# Altium PCB 324 Electrode Wafer PCB.PcbDoc (part 2 of 2)
Units mm, origin at the board's own origin, x right, y up, seen from the top; angles counter-clockwise.
Board outline 565 x 565 mm, 2 copper layers (Top Layer, Bottom Layer); 5 components, 324 nets, 648 pads, 0 vias.
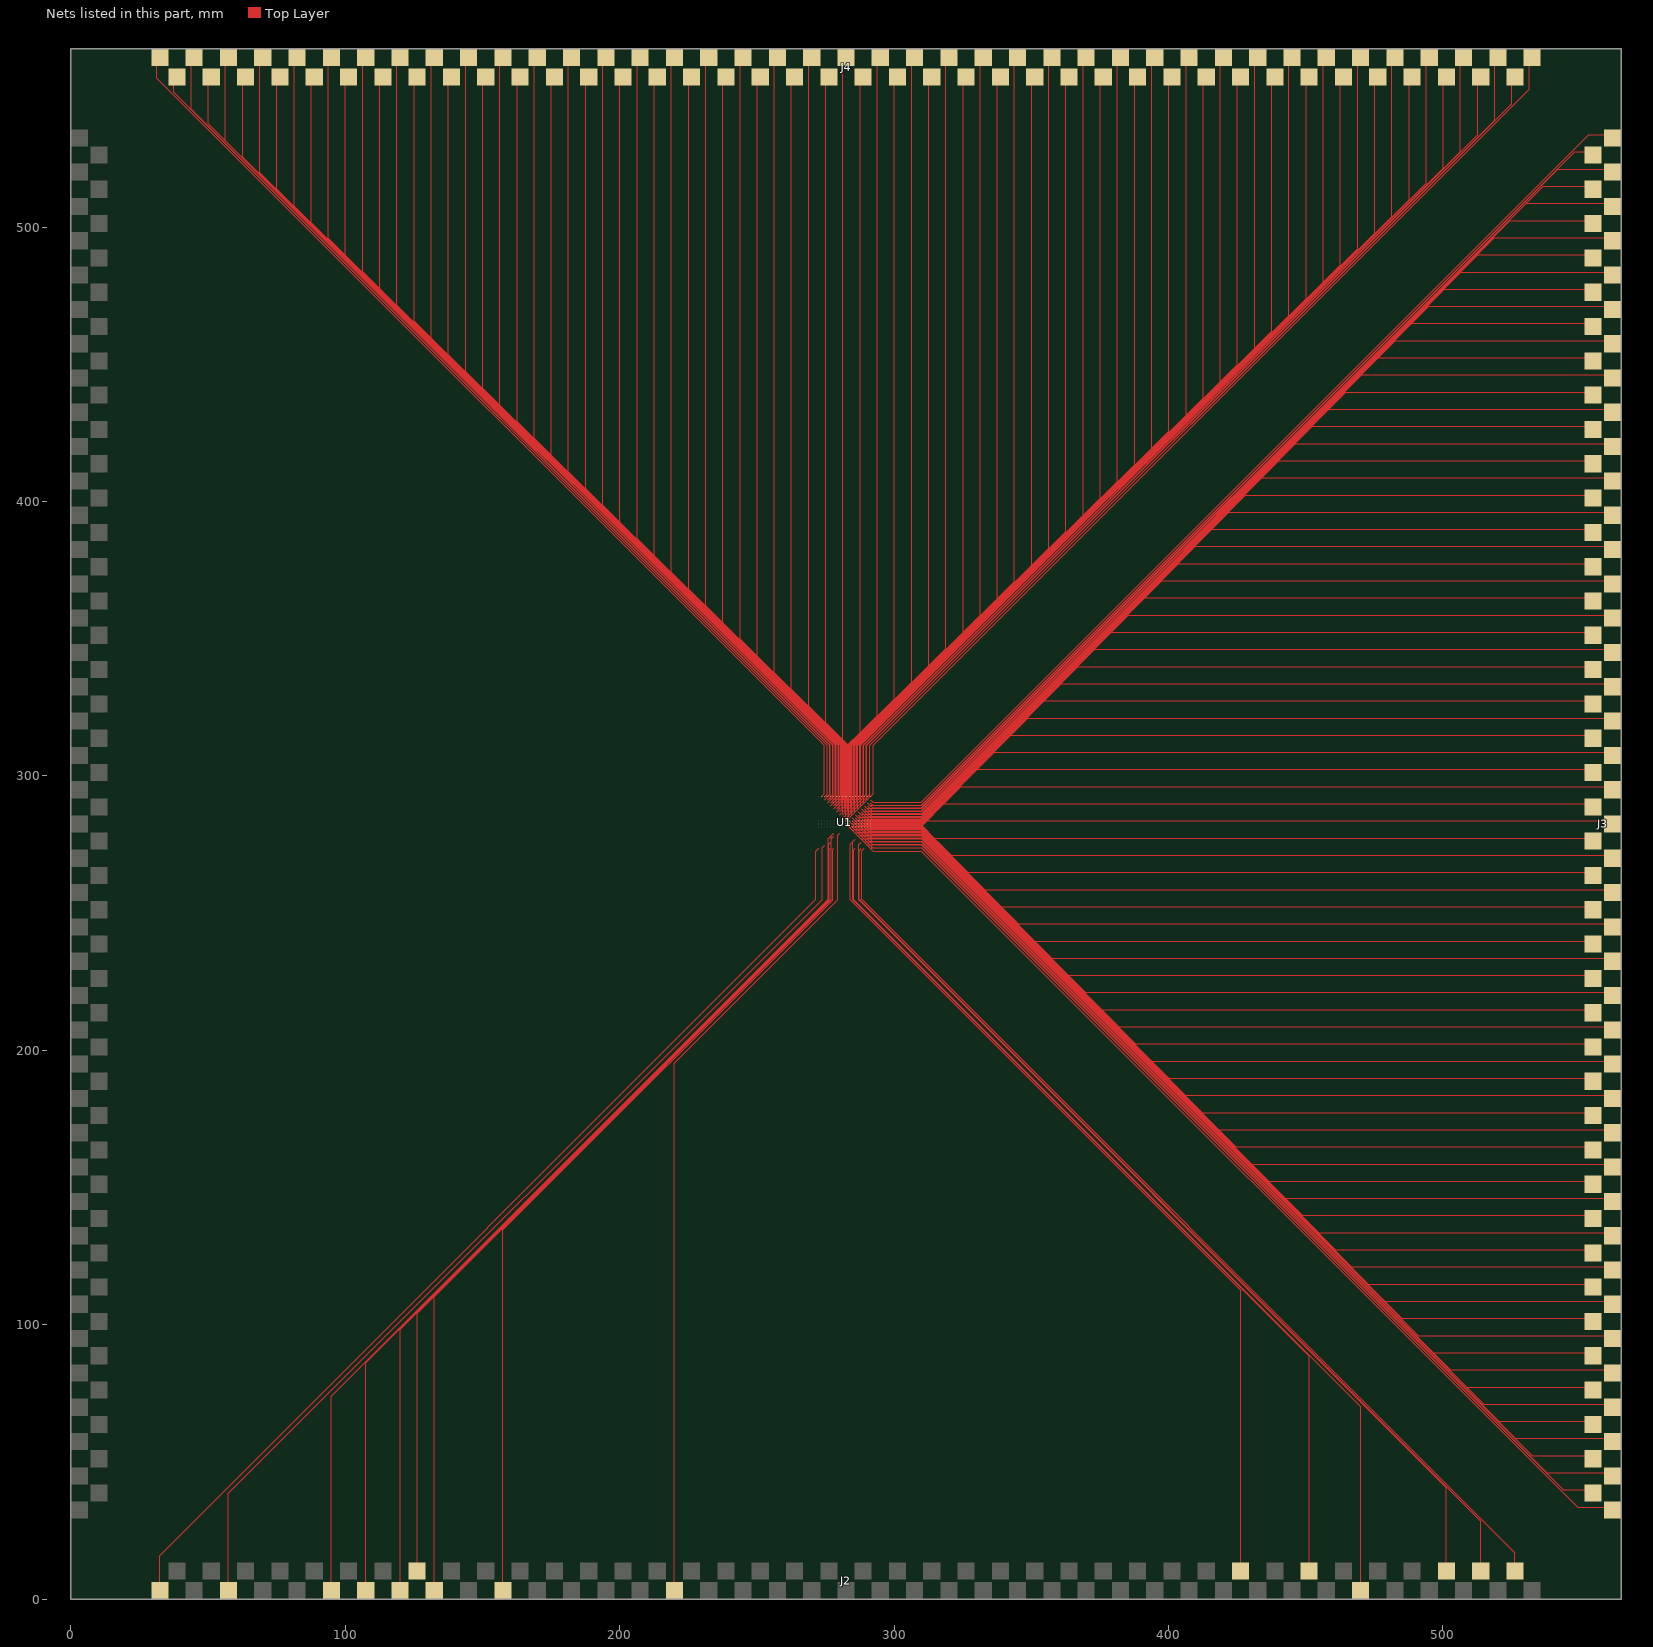
[diagram p2: the nets of this part, all layers, seen from the top]

## Nets (pads, with @x,y where several pads share a name; then routed paths per layer and width w, separated by ;. In a path a pad name is that pad's centre, name@x,y a point inside that pad or via, vN(x,y) a via of type N, cw(c..) or ccw(c..) an arc to the next point about the centre after c; other vN are vias at no path point) (continued)
NetJ2_67: J2.71 U1.239 | length 350.3
  Top Layer w0.05: J2.71@95,3.125 95,7.85 95,74 276,255 276,277.111 U1.239@276.944,278.056
NetJ2_68: J2.67 U1.311 | length 335.5
  Top Layer w0.05: J2.67@120,3.125 120,7.05 120,98.4 276.4,254.8 276.4,273.067 U1.311@276.944,273.611
NetJ2_69: J2.69 U1.275 | length 342.9
  Top Layer w0.05: J2.69@107.5,3.125 107.5,7.8 107.5,86.2 276.2,254.9 276.2,275.089 U1.275@276.944,275.833
NetJ2_70: J2.65 U1.240 | length 335.2
  Top Layer w0.05: J2.65@132.5,3.125 132.5,7.5 132.5,110.25 277.2,254.95 277.2,277.2 U1.240@278.056,278.056
NetJ2_71: J2.51 U1.224 | length 301
  Top Layer w0.05: J2.51@220,3.125 220,195.4 279.5,254.9 279.5,278.389 U1.224@280.278,279.167
NetJ2_72: J2.61 U1.312 | length 320.4
  Top Layer w0.05: J2.61@157.5,3.125 157.5,6.7 157.5,134.65 277.6,254.75 277.6,273.156 U1.312@278.056,273.611
NetJ2_73: J2.66 U1.222 | length 331.7
  Top Layer w0.05: J2.66@126.25,10.375 126.25,14.95 126.25,104.15 277.1,255 277.1,278.211 U1.222@278.056,279.167
NetJ2_74: J2.77 U1.291 | length 361.6
  Top Layer w0.05: J2.77@57.5,3.125 57.5,7.1 57.5,38.6 273.85,254.95 273.85,273.85 U1.291@274.722,274.722
NetJ2_75: J2.11 U1.319 | length 347.2
  Top Layer w0.05: U1.319@285.833,273.611 285.289,273.067 285.289,254.961 470,70.25 470,8.7 J2.11@470,3.125
NetJ2_76: J2.18 U1.282 | length 324.6
  Top Layer w0.05: U1.282@284.722,275.833 284.067,275.178 284.067,254.883 426.25,112.7 426.25,15.2 ; J2.18@426.25,10.375 426.25,15.2
NetJ2_77: J2.14 U1.265 | length 335.8
  Top Layer w0.05: U1.265@285.833,276.944 284.989,276.1 284.989,254.811 451.25,88.55 451.25,15.95 J2.14@451.25,10.375
NetJ2_78: J2.6 U1.285 | length 354.6
  Top Layer w0.05: U1.285@288.056,275.833 287.083,274.861 287.083,254.867 501.25,40.7 501.25,16 J2.6@501.25,10.375
NetJ2_79: J2.4 U1.321 | length 357.4
  Top Layer w0.05: U1.321@288.056,273.611 287.283,272.839 287.283,255 513.75,28.533 513.75,16.45 J2.4@513.75,10.375
NetJ2_80: J2.81 U1.307 | length 369.9
  Top Layer w0.05: J2.81@32.5,3.125 32.5,15.95 271.55,255 271.55,272.65 272.5,273.6 U1.307@272.5,273.611
NetJ2_81: J2.2 U1.322 | length 362.2
  Top Layer w0.05: U1.322@289.167,273.611 288.306,272.75 288.306,254.994 526.25,17.05 526.25,15.25 J2.2@526.25,10.375
NetJ3_1: J3.52 U1.192 | length 297.9
  Top Layer w0.05: U1.192@284.722,281.389 285.6,280.511 310.05,280.511 375.7,214.861 553.514,214.861 J3.52@554.625,213.75
NetJ3_2: J3.55 U1.215 | length 306.9
  Top Layer w0.05: U1.215@290.278,280.278 290.744,279.811 310.25,279.811 393.95,196.111 560.764,196.111 J3.55@561.875,195
NetJ3_3: J3.59 U1.211 | length 321.7
  Top Layer w0.05: U1.211@285.833,280.278 286.7,279.411 310.05,279.411 418.35,171.111 560.764,171.111 J3.59@561.875,170
NetJ3_4: J3.64 U1.231 | length 324.7
  Top Layer w0.05: U1.231@288.056,279.167 288.811,278.411 310.1,278.411 448.65,139.861 553.514,139.861 J3.64@554.625,138.75
NetJ3_5: J3.67 U1.252 | length 336
  Top Layer w0.05: U1.252@291.389,278.056 291.933,277.511 310.2,277.511 466.6,121.111 560.764,121.111 J3.67@561.875,120
NetJ3_6: J3.71 U1.248 | length 350.8
  Top Layer w0.05: U1.248@286.944,278.056 287.889,277.111 310,277.111 491,96.111 560.764,96.111 J3.71@561.875,95
NetJ3_7: J3.74 U1.268 | length 348.6
  Top Layer w0.05: U1.268@289.167,276.944 290.05,276.061 310.05,276.061 508.75,77.361 553.514,77.361 J3.74@554.625,76.25
NetJ3_8: J3.75 U1.267 | length 359.5
  Top Layer w0.05: U1.267@288.056,276.944 289.039,275.961 310,275.961 514.85,71.111 560.764,71.111 J3.75@561.875,70
NetJ3_9: J3.79 U1.306 | length 365.6
  Top Layer w0.05: U1.306@291.389,274.722 292.25,273.861 310.05,273.861 537.8,46.111 560.764,46.111 J3.79@561.875,45
NetJ3_10: J3.16 U1.126 | length 327.9
  Top Layer w0.05: U1.126@291.389,285.833 291.844,285.378 310.017,285.378 464.5,439.861 553.514,439.861 J3.16@554.625,438.75
NetJ3_11: J3.17 U1.125 | length 333.7
  Top Layer w0.05: U1.125@290.278,285.833 290.833,285.278 310.067,285.278 458.4,433.611 560.764,433.611 J3.17@561.875,432.5
NetJ3_12: J3.65 U1.230 | length 335.7
  Top Layer w0.05: U1.230@286.944,279.167 287.8,278.311 310.05,278.311 454.75,133.611 560.764,133.611 J3.65@561.875,132.5
NetJ3_13: J3.43 U1.174 | length 282.3
  Top Layer w0.05: U1.174@284.722,282.5 285.461,281.761 310.15,281.761 320.8,271.111 560.764,271.111 J3.43@561.875,270
NetJ3_14: J3.45 U1.172 | length 289.7
  Top Layer w0.05: U1.172@282.5,282.5 283.439,281.561 310.05,281.561 333,258.611 560.764,258.611 J3.45@561.875,257.5
NetJ3_15: J3.42 U1.175 | length 271.4
  Top Layer w0.05: U1.175@285.833,282.5 286.472,281.861 310.2,281.861 314.7,277.361 553.514,277.361 J3.42@554.625,276.25
NetJ3_16: J3.47 U1.197 | length 286.7
  Top Layer w0.05: U1.197@290.278,281.389 290.656,281.011 310.3,281.011 345.2,246.111 560.764,246.111 J3.47@561.875,245
NetJ3_17: J3.48 U1.196 | length 283.1
  Top Layer w0.05: U1.196@289.167,281.389 289.644,280.911 310.25,280.911 351.3,239.861 553.514,239.861 J3.48@554.625,238.75
NetJ3_18: J3.46 U1.198 | length 275.7
  Top Layer w0.05: U1.198@291.389,281.389 291.667,281.111 310.35,281.111 339.1,252.361 553.514,252.361 J3.46@554.625,251.25
NetJ3_19: J3.51 U1.193 | length 301.5
  Top Layer w0.05: U1.193@285.833,281.389 286.611,280.611 310.1,280.611 369.6,221.111 560.764,221.111 J3.51@561.875,220
NetJ3_20: J3.58 U1.212 | length 310.8
  Top Layer w0.05: U1.212@286.944,280.278 287.711,279.511 310.1,279.511 412.25,177.361 553.514,177.361 J3.58@554.625,176.25
NetJ3_21: J3.62 U1.233 | length 317.3
  Top Layer w0.05: U1.233@290.278,279.167 290.833,278.611 310.2,278.611 436.45,152.361 553.514,152.361 J3.62@554.625,151.25
NetJ3_22: J3.63 U1.232 | length 328.3
  Top Layer w0.05: U1.232@289.167,279.167 289.822,278.511 310.15,278.511 442.55,146.111 560.764,146.111 J3.63@561.875,145
NetJ3_23: J3.68 U1.251 | length 332.4
  Top Layer w0.05: U1.251@290.278,278.056 290.922,277.411 310.15,277.411 472.7,114.861 553.514,114.861 J3.68@554.625,113.75
NetJ3_24: J3.73 U1.269 | length 352.1
  Top Layer w0.05: U1.269@290.278,276.944 291.061,276.161 310.1,276.161 502.65,83.611 560.764,83.611 J3.73@561.875,82.5
NetJ3_25: J3.77 U1.287 | length 362
  Top Layer w0.05: U1.287@290.278,275.833 291.15,274.961 310.05,274.961 526.4,58.611 560.764,58.611 J3.77@561.875,57.5
NetJ3_26: J3.76 U1.288 | length 351.1
  Top Layer w0.05: U1.288@291.389,275.833 292.161,275.061 310.1,275.061 520.3,64.861 553.514,64.861 J3.76@554.625,63.75
NetJ3_27: J3.80 U1.305 | length 362.1
  Top Layer w0.05: U1.305@290.278,274.722 291.239,273.761 310,273.761 543.9,39.861 553.514,39.861 J3.80@554.625,38.75
NetJ3_28: J3.25 U1.141 | length 315.8
  Top Layer w0.05: U1.141@288.056,284.722 288.722,284.056 310.144,284.056 409.7,383.611 560.764,383.611 J3.25@561.875,382.5
NetJ3_29: J3.22 U1.144 | length 312.7
  Top Layer w0.05: U1.144@291.389,284.722 291.756,284.356 310,284.356 428.006,402.361 553.514,402.361 J3.22@554.625,401.25
NetJ3_30: J3.23 U1.143 | length 318.6
  Top Layer w0.05: U1.143@290.278,284.722 290.744,284.256 310.044,284.256 421.9,396.111 560.764,396.111 J3.23@561.875,395
NetJ3_31: J3.20 U1.122 | length 322.3
  Top Layer w0.05: U1.122@286.944,285.833 287.8,284.978 310.217,284.978 440.1,414.861 553.514,414.861 J3.20@554.625,413.75
NetJ3_32: J3.21 U1.121 | length 328.1
  Top Layer w0.05: U1.121@285.833,285.833 286.789,284.878 310.267,284.878 434,408.611 560.764,408.611 J3.21@561.875,407.5
NetJ3_33: J3.18 U1.124 | length 325.1
  Top Layer w0.05: U1.124@289.167,285.833 289.822,285.178 310.117,285.178 452.3,427.361 553.514,427.361 J3.18@554.625,426.25
NetJ3_34: J3.19 U1.123 | length 330.9
  Top Layer w0.05: U1.123@288.056,285.833 288.811,285.078 310.167,285.078 446.2,421.111 560.764,421.111 J3.19@561.875,420
NetJ3_35: J3.44 U1.173 | length 278.8
  Top Layer w0.05: U1.173@283.611,282.5 284.45,281.661 310.1,281.661 326.9,264.861 553.514,264.861 J3.44@554.625,263.75
NetJ3_36: J3.50 U1.194 | length 290.5
  Top Layer w0.05: U1.194@286.944,281.389 287.622,280.711 310.15,280.711 363.5,227.361 553.514,227.361 J3.50@554.625,226.25
NetJ3_37: J3.54 U1.216 | length 296
  Top Layer w0.05: U1.216@291.389,280.278 291.756,279.911 310.3,279.911 387.85,202.361 553.514,202.361 J3.54@554.625,201.25
NetJ3_38: J3.57 U1.213 | length 314.3
  Top Layer w0.05: U1.213@288.056,280.278 288.722,279.611 310.15,279.611 406.15,183.611 560.764,183.611 J3.57@561.875,182.5
NetJ3_39: J3.61 U1.234 | length 320.9
  Top Layer w0.05: U1.234@291.389,279.167 291.844,278.711 310.25,278.711 430.35,158.611 560.764,158.611 J3.61@561.875,157.5
NetJ3_40: J3.69 U1.250 | length 343.4
  Top Layer w0.05: U1.250@289.167,278.056 289.911,277.311 310.1,277.311 478.8,108.611 560.764,108.611 J3.69@561.875,107.5
NetJ3_41: J3.72 U1.270 | length 341.2
  Top Layer w0.05: U1.270@291.389,276.944 292.072,276.261 310.15,276.261 496.55,89.861 553.514,89.861 J3.72@554.625,88.75
NetJ3_42: J3.78 U1.286 | length 358.5
  Top Layer w0.05: U1.286@289.167,275.833 290.139,274.861 310,274.861 532.5,52.361 553.514,52.361 J3.78@554.625,51.25
NetJ3_43: J3.81 U1.324 | length 370.3
  Top Layer w0.05: U1.324@291.4,273.611 292.35,272.661 310,272.661 549.05,33.611 560.764,33.611 J3.81@561.875,32.5
NetJ3_44: J3.3 U1.53 | length 368.5
  Top Layer w0.05: U1.53@290.278,290.278 291.239,289.317 310.056,289.317 541.85,521.111 560.764,521.111 J3.3@561.875,520
NetJ3_45: J3.1 U1.36 | length 372.1
  Top Layer w0.05: U1.36@291.4,291.389 292.35,290.439 310,290.439 553.172,533.611 560.764,533.611 J3.1@561.875,532.5
NetJ3_46: J3.33 U1.158 | length 296.7
  Top Layer w0.05: U1.158@286.944,283.611 287.622,282.933 310.222,282.933 360.9,333.611 560.764,333.611 J3.33@561.875,332.5
NetJ3_47: J3.30 U1.161 | length 293.6
  Top Layer w0.05: U1.161@290.278,283.611 290.656,283.233 310.072,283.233 379.2,352.361 553.514,352.361 J3.30@554.625,351.25
NetJ3_48: J3.31 U1.160 | length 299.5
  Top Layer w0.05: U1.160@289.167,283.611 289.644,283.133 310.122,283.133 373.1,346.111 560.764,346.111 J3.31@561.875,345
NetJ3_49: J3.28 U1.138 | length 304.4
  Top Layer w0.05: U1.138@284.722,284.722 285.689,283.756 310.294,283.756 391.4,364.861 553.514,364.861 J3.28@554.625,363.75
NetJ3_50: J3.29 U1.162 | length 302.2
  Top Layer w0.05: U1.162@291.389,283.611 291.667,283.333 310.022,283.333 385.3,358.611 560.764,358.611 J3.29@561.875,357.5
NetJ3_51: J3.26 U1.140 | length 307.1
  Top Layer w0.05: U1.140@286.944,284.722 287.711,283.956 310.194,283.956 403.6,377.361 553.514,377.361 J3.26@554.625,376.25
NetJ3_52: J3.27 U1.139 | length 313
  Top Layer w0.05: U1.139@285.833,284.722 286.7,283.856 310.244,283.856 397.5,371.111 560.764,371.111 J3.27@561.875,370
NetJ3_53: J3.24 U1.142 | length 309.9
  Top Layer w0.05: U1.142@289.167,284.722 289.733,284.156 310.094,284.156 415.8,389.861 553.514,389.861 J3.24@554.625,388.75
NetJ3_54: J3.49 U1.195 | length 294.1
  Top Layer w0.05: U1.195@288.056,281.389 288.633,280.811 310.2,280.811 357.4,233.611 560.764,233.611 J3.49@561.875,232.5
NetJ3_55: J3.53 U1.191 | length 308.9
  Top Layer w0.05: U1.191@283.611,281.389 284.589,280.411 310,280.411 381.8,208.611 560.764,208.611 J3.53@561.875,207.5
NetJ3_56: J3.60 U1.210 | length 318.2
  Top Layer w0.05: U1.210@284.722,280.278 285.689,279.311 310,279.311 424.45,164.861 553.514,164.861 J3.60@554.625,163.75
NetJ3_57: J3.66 U1.229 | length 332.1
  Top Layer w0.05: U1.229@285.833,279.167 286.789,278.211 310,278.211 460.85,127.361 553.514,127.361 J3.66@554.625,126.25
NetJ3_58: J3.13 U1.106 | length 344.9
  Top Layer w0.05: U1.106@289.167,286.944 289.911,286.2 310.139,286.2 482.55,458.611 560.764,458.611 J3.13@561.875,457.5
NetJ3_59: J3.11 U1.108 | length 347.7
  Top Layer w0.05: U1.108@291.389,286.944 291.933,286.4 310.039,286.4 494.75,471.111 560.764,471.111 J3.11@561.875,470
NetJ3_60: J3.9 U1.88 | length 354.9
  Top Layer w0.05: U1.88@289.167,288.056 290.05,287.172 310.111,287.172 506.55,483.611 560.764,483.611 J3.9@561.875,482.5
NetJ3_61: J3.8 U1.89 | length 349
  Top Layer w0.05: U1.89@290.278,288.056 291.061,287.272 310.061,287.272 512.65,489.861 553.514,489.861 J3.8@554.625,488.75
NetJ3_62: J3.6 U1.70 | length 355
  Top Layer w0.05: U1.70@289.167,289.167 290.139,288.194 310.133,288.194 524.3,502.361 553.514,502.361 J3.6@554.625,501.25
NetJ3_63: J3.2 U1.54 | length 362.6
  Top Layer w0.05: U1.54@291.389,290.278 292.25,289.417 310.006,289.417 547.95,527.361 553.514,527.361 J3.2@554.625,526.25
NetJ3_64: J3.40 U1.177 | length 270.4
  Top Layer w0.05: U1.177@288.056,282.5 288.494,282.061 310.4,282.061 318.2,289.861 553.514,289.861 J3.40@554.625,288.75
NetJ3_65: J3.41 U1.176 | length 276.3
  Top Layer w0.05: U1.176@286.944,282.5 287.483,281.961 310.45,281.961 312.1,283.611 560.764,283.611 J3.41@561.875,282.5
NetJ3_66: J3.38 U1.179 | length 273.2
  Top Layer w0.05: U1.179@290.278,282.5 290.517,282.261 310.3,282.261 330.4,302.361 553.514,302.361 J3.38@554.625,301.25
NetJ3_67: J3.39 U1.178 | length 279.1
  Top Layer w0.05: U1.178@289.167,282.5 289.506,282.161 310.35,282.161 324.3,296.111 560.764,296.111 J3.39@561.875,295
NetJ3_68: J3.36 U1.155 | length 285.2
  Top Layer w0.05: U1.155@283.611,283.611 284.589,282.633 310.372,282.633 342.6,314.861 553.514,314.861 J3.36@554.625,313.75
NetJ3_69: J3.37 U1.180 | length 281.9
  Top Layer w0.05: U1.180@291.389,282.5 291.528,282.361 310.25,282.361 336.5,308.611 560.764,308.611 J3.37@561.875,307.5
NetJ3_70: J3.34 U1.157 | length 288
  Top Layer w0.05: U1.157@285.833,283.611 286.611,282.833 310.272,282.833 354.8,327.361 553.514,327.361 J3.34@554.625,326.25
NetJ3_71: J3.35 U1.156 | length 293.9
  Top Layer w0.05: U1.156@284.722,283.611 285.6,282.733 310.322,282.733 348.7,321.111 560.764,321.111 J3.35@561.875,320
NetJ3_72: J3.32 U1.159 | length 290.8
  Top Layer w0.05: U1.159@288.056,283.611 288.633,283.033 310.172,283.033 367,339.861 553.514,339.861 J3.32@554.625,338.75
NetJ3_73: J3.56 U1.214 | length 303.4
  Top Layer w0.05: U1.214@289.167,280.278 289.733,279.711 310.2,279.711 400.05,189.861 553.514,189.861 J3.56@554.625,188.75
NetJ3_74: J3.70 U1.249 | length 339.8
  Top Layer w0.05: U1.249@288.056,278.056 288.9,277.211 310.05,277.211 484.9,102.361 553.514,102.361 J3.70@554.625,101.25
NetJ3_75: J3.14 U1.105 | length 336.2
  Top Layer w0.05: U1.105@288.056,286.944 288.9,286.1 310.189,286.1 476.45,452.361 553.514,452.361 J3.14@554.625,451.25
NetJ3_76: J3.15 U1.104 | length 342.1
  Top Layer w0.05: U1.104@286.944,286.944 287.889,286 310.239,286 470.35,446.111 560.764,446.111 J3.15@561.875,445
NetJ3_77: J3.12 U1.107 | length 339
  Top Layer w0.05: U1.107@290.278,286.944 290.922,286.3 310.089,286.3 488.65,464.861 553.514,464.861 J3.12@554.625,463.75
NetJ3_78: J3.10 U1.87 | length 346.3
  Top Layer w0.05: U1.87@288.056,288.056 289.039,287.072 310.161,287.072 500.45,477.361 553.514,477.361 J3.10@554.625,476.25
NetJ3_79: J3.4 U1.72 | length 357.8
  Top Layer w0.05: U1.72@291.389,289.167 292.161,288.394 310,288.394 536.467,514.861 553.514,514.861 J3.4@554.625,513.75
NetJ3_80: J3.7 U1.90 | length 357.7
  Top Layer w0.05: U1.90@291.389,288.056 292.072,287.372 310,287.372 518.739,496.111 560.764,496.111 J3.7@561.875,495
NetJ3_81: J3.5 U1.71 | length 363.7
  Top Layer w0.05: U1.71@290.278,289.167 291.15,288.294 310.083,288.294 530.4,508.611 560.764,508.611 J3.5@561.875,507.5
NetJ4_1: J4.54 U1.12 | length 294.9
  Top Layer w0.05: U1.12@284.722,292.5 285.089,292.867 285.089,311.411 362.639,388.961 362.639,553.514 J4.54@363.75,554.625
NetJ4_2: J4.63 U1.49 | length 327.2
  Top Layer w0.05: U1.49@285.833,290.278 286.489,290.933 286.489,311.261 418.889,443.661 418.889,560.764 J4.63@420,561.875
NetJ4_3: J4.65 U1.85 | length 334.6
  Top Layer w0.05: U1.85@285.833,288.056 286.689,288.911 286.689,311.161 431.389,455.861 431.389,560.764 J4.65@432.5,561.875
NetJ4_4: J4.49 U1.65 | length 293
  Top Layer w0.05: U1.65@283.611,289.167 284.189,289.744 284.189,311.311 331.389,358.511 331.389,560.764 J4.49@332.5,561.875
NetJ4_5: J4.74 U1.51 | length 347.5
  Top Layer w0.05: U1.51@288.056,290.278 288.939,291.161 288.939,311.161 487.639,509.861 487.639,553.514 J4.74@488.75,554.625
NetJ4_6: J4.77 U1.34 | length 360.9
  Top Layer w0.05: U1.34@289.167,291.389 290.039,292.261 290.039,311.161 506.389,527.511 506.389,560.764 J4.77@507.5,561.875
NetJ4_7: J4.80 U1.35 | length 361
  Top Layer w0.05: U1.35@290.278,291.389 291.239,292.35 291.239,311.111 525.139,545.011 525.139,553.514 J4.80@526.25,554.625
NetJ4_8: J4.81 U1.18 | length 369.2
  Top Layer w0.05: U1.18@291.389,292.511 292.339,293.461 292.339,311.111 531.389,550.161 531.389,560.764 J4.81@532.5,561.875
NetJ4_9: J4.1 U1.2 | length 370.9
  Top Layer w0.05: J4.1@32.5,561.875 31.389,560.764 31.389,554.283 274.561,311.111 274.561,293.461 U1.2@273.611,292.511
NetJ4_10: J4.2 U1.3 | length 361.5
  Top Layer w0.05: J4.2@38.75,554.625 37.639,553.514 37.639,549.061 275.583,311.117 275.583,293.361 U1.3@274.722,292.5
NetJ4_11: J4.7 U1.5 | length 356.6
  Top Layer w0.05: J4.7@70,561.875 68.889,560.764 68.889,519.85 277.628,311.111 277.628,293.183 U1.5@276.944,292.5
NetJ4_12: J4.8 U1.23 | length 347.9
  Top Layer w0.05: J4.8@76.25,554.625 75.139,553.514 75.139,513.761 277.728,311.172 277.728,292.172 U1.23@276.944,291.389
NetJ4_13: J4.10 U1.59 | length 345.1
  Top Layer w0.05: J4.10@88.75,554.625 87.639,553.514 87.639,501.561 277.928,311.272 277.928,290.15 U1.59@276.944,289.167
NetJ4_14: J4.17 U1.25 | length 332.6
  Top Layer w0.05: J4.17@132.5,561.875 131.389,560.764 131.389,459.511 279.722,311.178 279.722,291.944 U1.25@279.167,291.389
NetJ4_15: J4.18 U1.43 | length 324
  Top Layer w0.05: J4.18@138.75,554.625 137.639,553.514 137.639,453.411 279.822,311.228 279.822,290.933 U1.43@279.167,290.278
NetJ4_16: J4.22 U1.8 | length 311.6
  Top Layer w0.05: J4.22@163.75,554.625 162.639,553.514 162.639,429.117 280.644,311.111 280.644,292.867 U1.8@280.278,292.5
NetJ4_17: J4.26 U1.80 | length 306
  Top Layer w0.05: J4.26@188.75,554.625 187.639,553.514 187.639,404.711 281.044,311.306 281.044,288.822 U1.80@280.278,288.056
NetJ4_18: J4.30 U1.27 | length 292.5
  Top Layer w0.05: J4.30@213.75,554.625 212.639,553.514 212.639,380.311 281.767,311.183 281.767,291.767 U1.27@281.389,291.389
NetJ4_19: J4.55 U1.30 | length 305.8
  Top Layer w0.05: U1.30@284.722,291.389 285.189,291.856 285.189,311.361 368.889,395.061 368.889,560.764 J4.55@370,561.875
NetJ4_20: J4.56 U1.48 | length 302.3
  Top Layer w0.05: U1.48@284.722,290.278 285.289,290.844 285.289,311.311 375.139,401.161 375.139,553.514 J4.56@376.25,554.625
NetJ4_21: J4.60 U1.120 | length 317.1
  Top Layer w0.05: U1.120@284.722,285.833 285.689,286.8 285.689,311.111 400.139,425.561 400.139,553.514 J4.60@401.25,554.625
NetJ4_22: J4.66 U1.103 | length 331
  Top Layer w0.05: U1.103@285.833,286.944 286.789,287.9 286.789,311.111 437.639,461.961 437.639,553.514 J4.66@438.75,554.625
NetJ4_23: J4.48 U1.47 | length 282
  Top Layer w0.05: U1.47@283.611,290.278 284.089,290.756 284.089,311.361 325.139,352.411 325.139,553.514 J4.48@326.25,554.625
NetJ4_24: J4.50 U1.83 | length 289.4
  Top Layer w0.05: U1.83@283.611,288.056 284.289,288.733 284.289,311.261 337.639,364.611 337.639,553.514 J4.50@338.75,554.625
NetJ4_25: J4.71 U1.86 | length 349.6
  Top Layer w0.05: U1.86@286.944,288.056 287.889,289 287.889,311.111 468.889,492.111 468.889,560.764 J4.71@470,561.875
NetJ4_26: J4.79 U1.17 | length 364.5
  Top Layer w0.05: U1.17@290.278,292.5 291.139,293.361 291.139,311.161 518.889,538.911 518.889,560.764 J4.79@520,561.875
NetJ4_27: J4.3 U1.21 | length 367.4
  Top Layer w0.05: J4.3@45,561.875 43.889,560.764 43.889,542.961 275.683,311.167 275.683,292.35 U1.21@274.722,291.389
NetJ4_28: J4.5 U1.22 | length 362.6
  Top Layer w0.05: J4.5@57.5,561.875 56.389,560.764 56.389,531.511 276.706,311.194 276.706,292.261 U1.22@275.833,291.389
NetJ4_29: J4.11 U1.6 | length 346.6
  Top Layer w0.05: J4.11@95,561.875 93.889,560.764 93.889,495.861 278.6,311.15 278.6,293.044 U1.6@278.056,292.5
NetJ4_30: J4.12 U1.24 | length 337.9
  Top Layer w0.05: J4.12@101.25,554.625 100.139,553.514 100.139,489.761 278.7,311.2 278.7,292.033 U1.24@278.056,291.389
NetJ4_31: J4.19 U1.61 | length 329.8
  Top Layer w0.05: J4.19@145,561.875 143.889,560.764 143.889,447.311 279.922,311.278 279.922,289.922 U1.61@279.167,289.167
NetJ4_32: J4.23 U1.26 | length 317.5
  Top Layer w0.05: J4.23@170,561.875 168.889,560.764 168.889,423.011 280.744,311.156 280.744,291.856 U1.26@280.278,291.389
NetJ4_33: J4.25 U1.62 | length 314.7
  Top Layer w0.05: J4.25@182.5,561.875 181.389,560.764 181.389,410.811 280.944,311.256 280.944,289.833 U1.62@280.278,289.167
NetJ4_34: J4.29 U1.9 | length 301.1
  Top Layer w0.05: J4.29@207.5,561.875 206.389,560.764 206.389,386.411 281.667,311.133 281.667,292.778 U1.9@281.389,292.5
NetJ4_35: J4.32 U1.63 | length 289.7
  Top Layer w0.05: J4.32@226.25,554.625 225.139,553.514 225.139,368.111 281.967,311.283 281.967,289.744 U1.63@281.389,289.167
NetJ4_36: J4.35 U1.117 | length 292.8
  Top Layer w0.05: J4.35@245,561.875 243.889,560.764 243.889,349.811 282.267,311.433 282.267,286.711 U1.117@281.389,285.833
NetJ4_37: J4.73 U1.33 | length 347.6
  Top Layer w0.05: U1.33@288.056,291.389 288.839,292.172 288.839,311.211 481.389,503.761 J4.73@481.389,558.861
NetJ4_38: J4.68 U1.32 | length 329.4
  Top Layer w0.05: U1.32@286.944,291.389 287.589,292.033 ; 287.589,293.761 287.589,292.033 ; J4.68@450.139,551.511 450.139,473.811 287.589,311.261 287.589,292.033
NetJ4_39: J4.52 U1.119 | length 296.8
  Top Layer w0.05: U1.119@283.611,285.833 284.489,286.711 284.489,311.161 350.139,376.811 350.139,553.514 J4.52@351.25,554.625
NetJ4_40: J4.57 U1.66 | length 313.2
  Top Layer w0.05: U1.66@284.722,289.167 285.389,289.833 285.389,311.261 381.389,407.261 381.389,560.764 J4.57@382.5,561.875
NetJ4_41: J4.62 U1.31 | length 316.2
  Top Layer w0.05: U1.31@285.833,291.389 286.389,291.944 286.389,311.311 412.639,437.561 412.639,553.514 J4.62@413.75,554.625
NetJ4_42: J4.69 U1.50 | length 342.2
  Top Layer w0.05: U1.50@286.944,290.278 287.689,291.022 287.689,311.211 456.389,479.911 456.389,560.764 J4.69@457.5,561.875
NetJ4_43: J4.75 U1.69 | length 358.4
  Top Layer w0.05: U1.69@288.056,289.167 289.039,290.15 289.039,311.111 493.889,515.961 493.889,560.764 J4.75@495,561.875
NetJ4_44: J4.78 U1.52 | length 357.4
  Top Layer w0.05: U1.52@289.167,290.278 290.139,291.25 290.139,311.111 512.639,533.611 512.639,553.514 J4.78@513.75,554.625
NetJ4_45: J4.4 U1.4 | length 356.7
  Top Layer w0.05: J4.4@51.25,554.625 50.139,553.514 50.139,537.578 276.606,311.111 276.606,293.272 U1.4@275.833,292.5
NetJ4_46: J4.9 U1.41 | length 353.8
  Top Layer w0.05: J4.9@82.5,561.875 81.389,560.764 81.389,507.661 277.828,311.222 277.828,291.161 U1.41@276.944,290.278
NetJ4_47: J4.14 U1.60 | length 335.1
  Top Layer w0.05: J4.14@113.75,554.625 112.639,553.514 112.639,477.561 278.9,311.3 278.9,290.011 U1.60@278.056,289.167
NetJ4_48: J4.15 U1.78 | length 341
  Top Layer w0.05: J4.15@120,561.875 118.889,560.764 118.889,471.461 279,311.35 279,289 U1.78@278.056,288.056
NetJ4_49: J4.20 U1.79 | length 321.2
  Top Layer w0.05: J4.20@151.25,554.625 150.139,553.514 150.139,441.211 280.022,311.328 280.022,288.911 U1.79@279.167,288.056
NetJ4_50: J4.27 U1.98 | length 311.9
  Top Layer w0.05: J4.27@195,561.875 193.889,560.764 193.889,398.611 281.144,311.356 281.144,287.811 U1.98@280.278,286.944
NetJ4_51: J4.28 U1.116 | length 303.2
  Top Layer w0.05: J4.28@201.25,554.625 200.139,553.514 200.139,392.511 281.244,311.406 281.244,286.8 U1.116@280.278,285.833
NetJ4_52: J4.33 U1.81 | length 295.6
  Top Layer w0.05: J4.33@232.5,561.875 231.389,560.764 231.389,362.011 282.067,311.333 282.067,288.733 U1.81@281.389,288.056
NetJ4_53: J4.37 U1.10 | length 280.8
  Top Layer w0.05: J4.37@257.5,561.875 256.389,560.764 256.389,337.611 282.639,311.361 282.639,292.639 U1.10@282.5,292.5
NetJ4_54: J4.34 U1.99 | length 286.9
  Top Layer w0.05: J4.34@238.75,554.625 237.639,553.514 237.639,355.911 282.167,311.383 282.167,287.722 U1.99@281.389,286.944
NetJ4_55: J4.46 U1.11 | length 274.6
  Top Layer w0.05: U1.11@283.611,292.5 283.889,292.778 283.889,311.461 312.639,340.211 312.639,553.514 J4.46@313.75,554.625
NetJ4_56: J4.45 U1.154 | length 288.6
  Top Layer w0.05: U1.154@282.5,283.611 283.439,284.55 283.439,311.161 306.389,334.111 306.389,560.764 J4.45@307.5,561.875
NetJ4_57: J4.51 U1.101 | length 300.4
  Top Layer w0.05: U1.101@283.611,286.944 284.389,287.722 284.389,311.211 343.889,370.711 343.889,560.764 J4.51@345,561.875
NetJ4_58: J4.61 U1.13 | length 317.3
  Top Layer w0.05: U1.13@285.833,292.5 286.289,292.956 ; 286.289,293.761 286.289,292.956 ; J4.61@406.389,559.011 406.389,431.461 286.289,311.361 286.289,292.956
NetJ4_59: J4.42 U1.100 | length 270.3
  Top Layer w0.05: U1.100@282.5,286.944 283.139,287.583 283.139,311.311 287.639,315.811 287.639,553.514 J4.42@288.75,554.625
NetJ4_60: J4.59 U1.102 | length 320.6
  Top Layer w0.05: U1.102@284.722,286.944 285.589,287.811 285.589,311.161 393.889,419.461 393.889,560.764 J4.59@395,561.875
NetJ4_61: J4.53 U1.137 | length 307.8
  Top Layer w0.05: U1.137@283.611,284.722 284.589,285.7 284.589,311.111 356.389,382.911 356.389,560.764 J4.53@357.5,561.875
NetJ4_62: J4.76 U1.16 | length 350
  Top Layer w0.05: U1.16@289.167,292.5 289.939,293.272 289.939,311.211 500.139,521.411 500.139,553.514 J4.76@501.25,554.625
NetJ4_63: J4.6 U1.40 | length 353.9
  Top Layer w0.05: J4.6@63.75,554.625 62.639,553.514 62.639,525.411 276.806,311.244 276.806,291.25 U1.40@275.833,290.278
NetJ4_64: J4.16 U1.7 | length 326.8
  Top Layer w0.05: J4.16@126.25,554.625 125.139,553.514 125.139,465.611 279.622,311.128 279.622,292.956 U1.7@279.167,292.5
NetJ4_65: J4.13 U1.42 | length 343.8
  Top Layer w0.05: J4.13@107.5,561.875 106.389,560.764 106.389,483.661 278.8,311.25 278.8,291.022 U1.42@278.056,290.278
NetJ4_66: J4.21 U1.97 | length 327
  Top Layer w0.05: J4.21@157.5,561.875 156.389,560.764 156.389,435.111 280.122,311.378 280.122,287.9 U1.97@279.167,286.944
NetJ4_67: J4.24 U1.44 | length 308.8
  Top Layer w0.05: J4.24@176.25,554.625 175.139,553.514 175.139,416.911 280.844,311.206 280.844,290.844 U1.44@280.278,290.278
NetJ4_68: J4.31 U1.45 | length 298.3
  Top Layer w0.05: J4.31@220,561.875 218.889,560.764 218.889,374.211 281.867,311.233 281.867,290.756 U1.45@281.389,290.278
NetJ4_69: J4.40 U1.64 | length 269.3
  Top Layer w0.05: J4.40@276.25,554.625 275.139,553.514 275.139,319.311 282.939,311.511 282.939,289.606 U1.64@282.5,289.167
NetJ4_70: J4.38 U1.28 | length 272.1
  Top Layer w0.05: J4.38@263.75,554.625 262.639,553.514 262.639,331.511 282.739,311.411 282.739,291.628 U1.28@282.5,291.389
NetJ4_71: J4.39 U1.46 | length 278
  Top Layer w0.05: J4.39@270,561.875 268.889,560.764 268.889,325.411 282.839,311.461 282.839,290.617 U1.46@282.5,290.278
NetJ4_72: J4.36 U1.135 | length 284.1
  Top Layer w0.05: J4.36@251.25,554.625 250.139,553.514 250.139,343.711 282.367,311.483 282.367,285.7 U1.135@281.389,284.722
NetJ4_73: J4.44 U1.136 | length 277.7
  Top Layer w0.05: U1.136@282.5,284.722 283.339,285.561 283.339,311.211 300.139,328.011 300.139,553.514 J4.44@301.25,554.625
NetJ4_74: J4.43 U1.118 | length 281.2
  Top Layer w0.05: U1.118@282.5,285.833 283.239,286.572 283.239,311.261 293.889,321.911 293.889,560.764 J4.43@295,561.875
NetJ4_75: J4.72 U1.15 | length 336.6
  Top Layer w0.05: U1.15@288.056,292.5 288.739,293.183 288.739,311.261 475.139,497.661 J4.72@475.139,551.561
NetJ4_76: J4.47 U1.29 | length 285.6
  Top Layer w0.05: U1.29@283.611,291.389 283.989,291.767 283.989,311.411 318.889,346.311 318.889,560.764 J4.47@320,561.875
NetJ4_77: J4.70 U1.68 | length 338.9
  Top Layer w0.05: U1.68@286.944,289.167 287.789,290.011 ; 287.789,293.761 287.789,290.011 ; J4.70@462.639,551.561 462.639,486.011 287.789,311.161 287.789,290.011
NetJ4_78: J4.58 U1.84 | length 309.7
  Top Layer w0.05: U1.84@284.722,288.056 285.489,288.822 285.489,311.211 387.639,413.361 387.639,553.514 J4.58@388.75,554.625
NetJ4_79: J4.64 U1.67 | length 323.6
  Top Layer w0.05: U1.67@285.833,289.167 286.589,289.922 286.589,311.211 425.139,449.761 425.139,553.514 J4.64@426.25,554.625
NetJ4_80: J4.67 U1.14 | length 334.8
  Top Layer w0.05: U1.14@286.944,292.5 287.489,293.044 287.489,311.311 443.889,467.711 443.889,560.764 J4.67@445,561.875
NetJ4_81: J4.41 U1.82 | length 275.2
  Top Layer w0.05: U1.82@282.5,288.056 283.039,288.594 283.039,311.561 281.389,313.211 281.389,560.764 J4.41@282.5,561.875